# EAGLE board REVB (EAGLE 9.0.1)
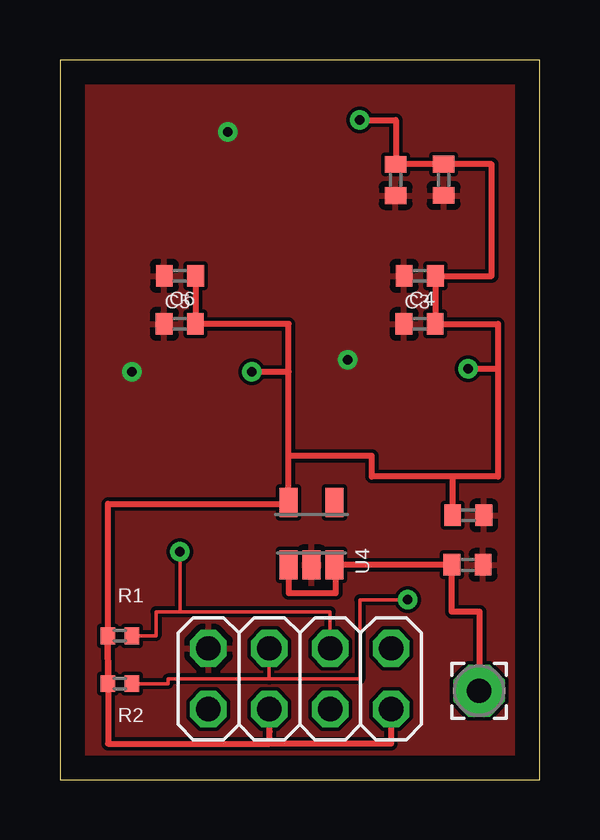
[diagram p0: board, top side]
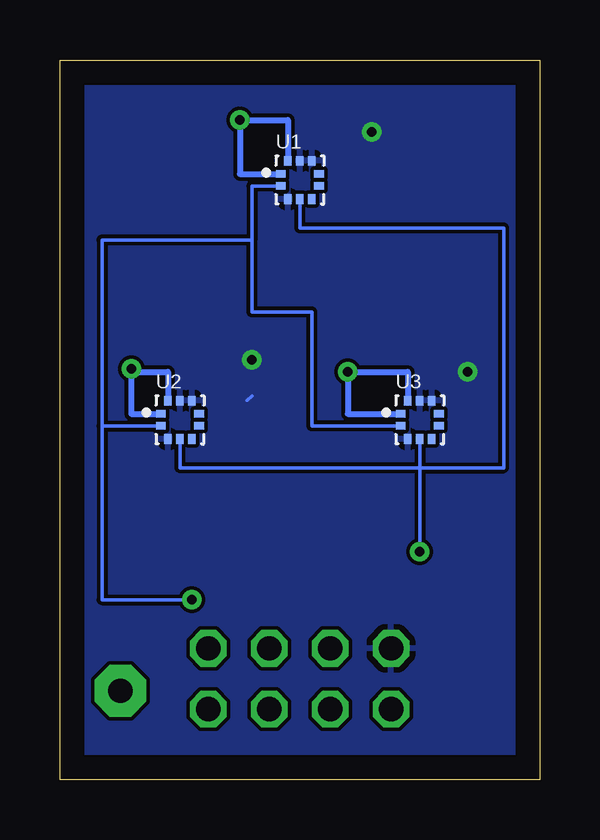
[diagram p1: board, bottom side, seen from below]

Size 20 x 30 mm. Coordinates in mm from the lower left corner, seen from the top.
Outline: 0,0 20,0 20,30 0,30 0,0
Copper layers (1*16): Top 0.035mm / dielectric 1.5mm / Bottom 0.035mm
Design rules "default": minimum track width 6mil, minimum drill 0.35mm, track to track 6mil, track to pad 6mil, pad to pad 6mil, via to via 6mil, smd to smd 6mil, copper to edge 40mil, drill to drill 6mil, minimum pad ring 10mil, minimum via ring 8mil, stop-mask expansion 4mil, vias tented up to drill 0mil, thermal gap 10mil

## Footprints (pad centres in the part's own frame; a part is rotated, then mirrored left to right if it is on the bottom)
C0402 = smd 0.7 x 0.9: 1 -0.65,0; 2 0.65,0
2X04 = drill 1.016 octagon: 1 -3.81,-1.27; 2 -3.81,1.27; 3 -1.27,-1.27; 4 -1.27,1.27; 5 1.27,-1.27; 6 1.27,1.27; 7 3.81,-1.27; 8 3.81,1.27
2,15/1,0 = drill 1.016 pad 2.159 octagon: 1 0,0
R0402 = smd 0.6 x 0.7: 1 -0.5,0; 2 0.5,0
LGA10R50P2X3_200X200X80 = smd 0.4 x 0.3: 1 -0.8,0.25; 2 -0.8,-0.25; 6 0.8,-0.25; 7 0.8,0.25 | smd 0.3 x 0.4: 3 -0.5,-0.8; 4 0,-0.8; 5 0.5,-0.8; 8 0.5,0.8; 9 0,0.8; 10 -0.5,0.8
SOT23-DBV = smd 0.75 x 1.2: 1 -0.95,-1.3; 2 0,-1.3; 3 0.95,-1.3; 4 0.95,1.3; 5 -0.95,1.3

## Placement (x,y rotation side)
C1  100nF  [C0402]  14,25 270 top
C2  10uF  [C0402]  16,25 270 top
C3  100nF  [C0402]  15,19 0 top
C4  10uF  [C0402]  15,21 180 top
C5  100nF  [C0402]  5,19 0 top
C6  10uF  [C0402]  5,21 180 top
C9  0.1uF  [C0402]  17.03,11.02 0 top
C10  10uF  [C0402]  17,8.95 0 top
JP2  [2X04]  10,4.2 180 top
PAD1  [2,15/1,0]  17.48,3.7 0 top
R1  1k  [R0402]  2.5,6 180 top
R2  1k  [R0402]  2.5,4 180 top
U1  LPS22HB  [LGA10R50P2X3_200X200X80]  10,25 0 bottom
U2  LPS22HB  [LGA10R50P2X3_200X200X80]  15,15 0 bottom
U3  LPS22HB  [LGA10R50P2X3_200X200X80]  5,15 0 bottom
U4  TPS73633DBVR  [SOT23-DBV]  10.49,10.25 0 top

## Library data of the parts
C1-C6 C9 C10 = rcl; SPICEPREFIX: C
JP2 = pinhead
PAD1 = wirepad
R1 R2 = rcl; SPICEPREFIX: R
U1-U3 = LPS22HB; AVAILABILITY: Unavailable; DESCRIPTION: MEMS nano pressure sensor: 260-1260 hPa absolute digital output barometer; MF: STMicroelectronics; MP: LPS22HB; PACKAGE: None; PRICE: None
U4 = TPS73633DBVR; AVAILABILITY: Good; DESCRIPTION: Single Output LDO, 400mA, Adj._1.2 to 5.5V_, Cap free, Low Noise, Reverse Current Protection 5-SOT-23 -40 to 125; MF: Texas Instruments; MP: TPS73633DBVR; PACKAGE: SOT-23 Texas Instruments; PRICE: 1.20 USD

## Nets
ESPRES: JP2.4
GND: C1.2 C2.2 C3.1 C4.2 C5.1 C6.2 C9.2 C10.2 JP2.7 U1.3 U1.8 U1.9 U2.3 U2.8 U2.9 U3.3 U3.8 U3.9 U4.2
RX: JP2.1
SCL: JP2.5 R2.1 U1.2 U2.2 U3.2
SDA: JP2.3 R1.1 U1.4 U2.4 U3.4
TX: JP2.8
VBAT: C10.1 PAD1.1 U4.1 U4.3
VCC: C1.1 C2.1 C3.2 C4.1 C5.2 C6.1 C9.1 JP2.2 JP2.6 R1.2 R2.2 U1.1 U1.10 U2.1 U2.10 U3.1 U3.10 U4.5

## Tracks (layer width: path | path; a pad name or v marks a point on that pad's centre or on a via)
GND  (via drill 0.4)
  Bottom 0.152: 12.2,15.8 12,16
  other vias: 12,17.5 3,17 7,27
  pour Top: -1,31 21,31 21,-1 -1,-1
  pour Bottom: 0,30 0,0 20,0 20,30
  pour Bottom: 0,30 20,30 20,0 0,0
SCL  (via drill 0.4)
  Top 0.152: v14.5,7.5 12.5,7.5 12.5,4.19 8.72,4.19 | 8.72,4.19 JP2.5 | 8.72,4.19 4.5,4.19 4.5,4 R2.1
  Bottom 0.152: U1.2 12,24.75 12,22.5 | 12,22.5 18.24,22.5 18.24,14.75 | U3.2 9.5,14.75 9.5,19.5 12,19.5 12,22.5 | 18.24,14.75 U2.2 | 18.24,14.75 18.24,7.5 v14.5,7.5
SDA  (via drill 0.4)
  Top 0.152: JP2.3 11.27,7 5,7 | 5,7 4,7 4,6 R1.1 | v5,9.5 5,7
  Bottom 0.152: U3.4 5,13 | 5,13 15,13 U2.4 | 5,13 1.5,13 1.5,23 10,23 U1.4 | 5,13 v5,9.5
VBAT
  Top 0.254: PAD1.1 17.5,3.7 17.5,7 16.34,7 | 16.34,7 | 16.34,7 C10.1 U4.3 11.5,8.95 11.5,7.77 9.54,7.77 U4.1
VCC  (via drill 0.4)
  Top 0.254: C6.1 C5.2 9.54,19 9.54,17 | C1.1 C2.1 18,25.65 18,21 C4.1 C3.2 18.27,19 18.27,17.12 | C1.1 | 16.36,12.63 18.27,12.63 18.27,17.12 | 16.36,12.63 16.36,11.02 C9.1 | 18.27,17.12 v17.03,17.12 | 9.54,13.5 U4.5 9.54,11.5 2,11.5 R2.2 R1.2 R2.2 2,1.5 8.75,1.5 | 9.54,13.5 9.54,17 | 9.54,17 v8,17 | 8.75,1.5 8.75,1.99 8.73,1.99 JP2.6 | JP2.2 13.81,1.5 8.75,1.5 | v12.5,27.5 14,27.5 C1.1 | 16.36,12.63 13,12.63 13,13.5 9.54,13.5
  Top 0.406: C5.2
  Bottom 0.254: U3.10 5.5,17 v8,17 8,15.25 U3.1 | U2.10 15.5,17 17.03,17 v17.03,17.12 17.03,15.25 U2.1 | U1.10 10.5,27.5 v12.5,27.5 12.5,25.25 U1.1